# EAGLE board electric_fence (EAGLE 8.2.0)
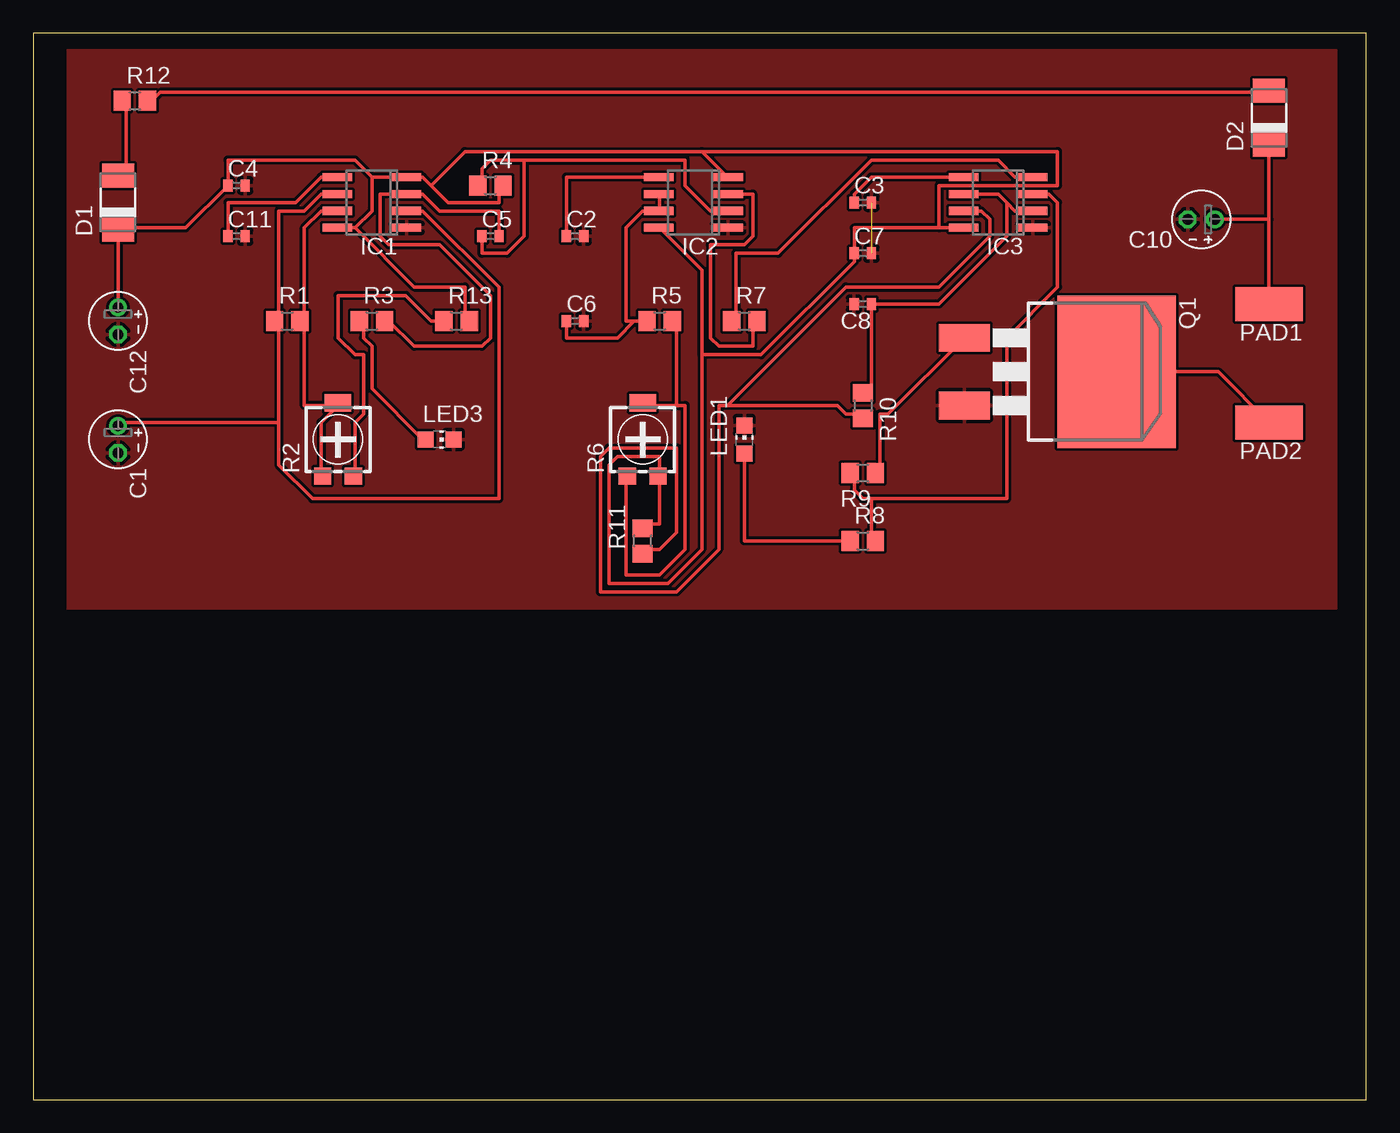
[diagram p0: board, top side]

Size 100 x 80 mm. Coordinates in mm from the lower left corner, seen from the top.
Outline: 0,0 100,0 100,80 0,80 0,0
Copper layers (1*16): Top 0.035mm / dielectric 1.5mm / Bottom 0.035mm
Design rules "default": minimum track width 10mil, minimum drill 24mil, track to track 8mil, track to pad 8mil, pad to pad 8mil, via to via 8mil, smd to smd 8mil, copper to edge 40mil, drill to drill 8mil, minimum pad ring 10mil, minimum via ring 8mil, stop-mask expansion 4mil, vias tented up to drill 0mil, thermal gap 10mil

## Footprints (pad centres in the part's own frame; a part is rotated, then mirrored left to right if it is on the bottom)
E2-4 = drill 0.813 pad 1.27: + -1.016,0 | drill 0.813 pad 1.27 octagon: - 1.016,0
C0402 = smd 0.7 x 0.9: 1 -0.65,0; 2 0.65,0
DO-214AC = smd 1.8 x 2.4: A 2.025,0; C -2.025,0
SO08 = smd 0.6 x 2.2: 1 -1.905,-2.6; 2 -0.635,-2.6; 3 0.635,-2.6; 4 1.905,-2.6; 5 1.905,2.6; 6 0.635,2.6; 7 -0.635,2.6; 8 -1.905,2.6
CHIP-LED0805 = smd 1.2 x 1.2: A 0,-1.05; C 0,1.05
SMD2,54-5,08 = smd 2.54 x 5.08: 1 0,0
D2PACK = smd 2.083 x 3.81: 1 -2.54,-8.89; 3 2.54,-8.89 | smd 11.43 x 8.89: 2 0,2.54
R0805 = smd 1.3 x 1.5: 1 -0.95,0; 2 0.95,0
RTRIM4G/J = smd 1.3 x 1.3: 1 -1.15,-2.75; 3 1.15,-2.75 | smd 2 x 1.3: 2 0,2.75

## Placement (x,y rotation side)
C1  10u  [E2-4]  6.35,49.53 270 top
C2  0.01  [C0402]  40.64,64.77 0 top
C3  0.01  [C0402]  62.23,67.31 0 top
C4  0.1  [C0402]  15.24,68.58 0 top
C5  0.01  [C0402]  34.29,64.77 0 top
C6  0.47  [C0402]  40.64,58.42 0 top
C7  0.1  [C0402]  62.23,63.5 0 top
C8  0.1  [C0402]  62.23,59.69 180 top
C10  1000u  [E2-4]  87.63,66.04 180 top
C11  0.01  [C0402]  15.24,64.77 0 top
C12  220u  [E2-4]  6.35,58.42 270 top
D1  [DO-214AC]  6.35,67.31 90 top
D2  [DO-214AC]  92.71,73.66 90 top
IC1  LM555D  [SO08]  25.4,67.31 90 top
IC2  LM555D  [SO08]  49.53,67.31 90 top
IC3  LM555D  [SO08]  72.39,67.31 90 top
LED1  [CHIP-LED0805]  53.34,49.53 0 top
LED3  [CHIP-LED0805]  30.48,49.53 270 top
PAD1  [SMD2,54-5,08]  92.71,59.69 90 top
PAD2  [SMD2,54-5,08]  92.71,50.8 90 top
Q1  IRF3704S  [D2PACK]  78.74,54.61 270 top
R1  470  [R0805]  19.05,58.42 0 top
R2  470k  [RTRIM4G/J]  22.86,49.53 0 top
R3  620  [R0805]  25.4,58.42 0 top
R4  33k  [R0805]  34.29,68.58 0 top
R5  2k4  [R0805]  46.99,58.42 0 top
R6  100k  [RTRIM4G/J]  45.72,49.53 0 top
R7  100  [R0805]  53.34,58.42 0 top
R8  620  [R0805]  62.23,41.91 0 top
R9  100  [R0805]  62.23,46.99 180 top
R10  68k  [R0805]  62.23,52.07 270 top
R11  3k3  [R0805]  45.72,41.91 90 top
R12  51  [R0805]  7.62,74.93 0 top
R13  47k  [R0805]  31.75,58.42 0 top

## Library data of the parts
C1 C10 C12 R2 R6 = resistor
C2-C8 C11 = rcl
D1 D2 = diode
IC1-IC3 = linear
LED1 LED3 = led
PAD1 PAD2 = wirepad
Q1 = transistor-power
R1 R3-R5 R7-R13 = eagle-ltspice; SPICEMODEL: NONE; SPICEPREFIX: R

## Nets
+12V: D2.A R12.2
GND: C1.- C2.2 C3.2 C4.2 C6.2 C7.2 C8.2 C10.- C11.2 C12.- IC1.1 IC2.1 IC3.1 LED1.C LED3.C Q1.3
N$2: C2.1 IC2.5
N$3: C3.1 IC3.5
N$4: R5.2 R6.1 R6.2
N$5: C1.+ IC1.2 IC1.6 R1.1
N$6: IC1.7 R1.2 R2.1 R2.2
N$7: C5.2 IC1.3 R3.2
N$8: LED3.A R3.1
N$9: C5.1 IC2.2 R4.1
N$10: C6.1 IC2.6 IC2.7 R5.1
N$11: IC2.3 R7.2
N$12: IC3.4 R7.1
N$13: C8.1 IC3.2 IC3.6 R10.1
N$14: C11.1 IC1.5
N$15: C4.1 C7.1 C12.+ D1.C IC1.4 IC1.8 IC2.4 IC2.8 IC3.8 R4.2 R6.3 R11.2 R13.2
N$16: IC3.3 R8.2 R9.2
N$17: LED1.A R8.1
N$18: C10.+ D2.C PAD1.1
N$19: Q1.1 R9.1
N$20: D1.A R12.1
N$21: PAD2.1 Q1.2
N$22: IC3.7 R10.2 R11.1
N$23: R2.3 R13.1

## Tracks (layer width: path | path; a pad name or v marks a point on that pad's centre or on a via)
+12V
  Top 0.254: R12.2 8.89,74.93 9.53,75.56 92.71,75.56 D2.A
GND  (1 unrouted)
  pour Top: 2.54,78.74 2.54,36.83 97.79,36.83 97.79,78.74
N$2
  Top 0.254: IC2.5 40.01,69.22 40.01,64.77 C2.1
N$3
  Top 0.254: IC3.5 62.87,69.22 61.59,67.94 61.59,67.31 C3.1
N$4
  Top 0.254: 48.26,52.07 45.72,52.07 R6.2 | 48.26,52.07 48.9,52.07 48.9,41.27 46.99,39.37 44.45,39.37 44.45,46.35 R6.1 | 48.26,52.07 48.26,58.42 R5.2
N$5
  Top 0.254: 18.41,58.42 18.41,66.67 20.32,66.67 21.59,67.94 IC1.6 | IC1.2 29.21,66.67 34.92,60.96 34.92,45.09 20.95,45.09 18.41,47.62 18.41,50.8 | 18.41,58.42 18.41,50.8 | 18.41,58.42 R1.1 | 18.41,50.8 6.35,50.8 C1.+
N$6
  Top 0.254: 22.86,52.07 21.59,50.8 21.59,46.99 R2.1 | 20.32,58.42 20.32,52.07 22.86,52.07 | 22.86,52.07 R2.2 | IC1.7 21.59,66.67 20.32,65.41 20.32,58.42 | 20.32,58.42 R1.2
N$7
  Top 0.254: C5.2 34.92,64.77 34.92,66.67 30.48,66.67 29.21,67.94 IC1.3 26.04,67.94 26.04,64.77 26.67,64.14 30.48,64.14 34.29,60.33 34.29,57.15 33.66,56.52 28.57,56.52 26.67,58.42 R3.2
N$8
  Top 0.254: LED3.A 29.21,49.53 25.4,53.34 25.4,56.52 24.77,57.15 24.77,58.42 R3.1
N$9
  Top 0.254: 36.83,70.48 36.83,64.77 35.56,63.5 33.66,63.5 33.66,64.77 C5.1 | 36.83,70.48 34.29,70.48 33.66,69.85 33.66,68.58 R4.1 | IC2.2 50.8,66.67 48.9,68.58 48.9,70.48 36.83,70.48
N$10
  Top 0.254: IC2.6 46.99,67.94 46.99,66.67 IC2.7 45.72,66.67 44.45,65.41 44.45,58.42 45.09,58.42 | 45.09,58.42 43.81,57.15 40.01,57.15 40.01,58.42 C6.1 | R5.1 45.09,58.42
N$11
  Top 0.254: IC2.3 53.98,67.94 53.98,64.77 53.34,64.14 50.8,64.14 50.8,57.15 51.44,56.52 53.98,56.52 53.98,58.42 R7.2
N$12
  Top 0.254: IC3.4 73.66,69.22 72.39,70.48 62.87,70.48 55.88,63.5 52.7,63.5 52.7,58.42 R7.1
N$13
  Top 0.254: R10.1 62.23,53.34 62.87,53.34 62.87,59.69 C8.1 67.94,59.69 73.03,64.77 73.03,67.31 | IC3.6 72.39,67.94 73.03,67.31 | 73.03,67.31 73.66,66.67 IC3.2
N$14
  Top 0.254: IC1.5 21.59,69.22 19.68,67.31 14.61,67.31 14.61,64.77 C11.1
N$15
  Top 0.254: R11.2 45.72,43.18 46.99,43.18 46.99,46.35 R6.3 46.99,46.99 46.99,48.26 43.81,48.26 43.18,47.62 43.18,38.73 47.62,38.73 50.16,41.27 50.16,55.88 | 61.59,63.5 61.59,65.41 67.94,65.41 | IC3.8 67.94,65.41 | 50.16,55.88 50.16,62.23 46.99,65.41 IC2.8 | 50.16,55.88 54.61,55.88 61.59,62.87 61.59,63.5 | 61.59,63.5 C7.1 | 14.61,68.58 11.43,65.41 6.35,65.41 D1.C C12.+ | 24.13,65.41 28.57,60.96 32.38,60.96 32.38,58.42 R13.2 | IC1.8 24.13,65.41 | 29.84,68.58 29.21,69.22 IC1.4 25.4,69.22 | 29.84,68.58 31.11,67.31 34.92,67.31 34.92,68.58 R4.2 | 50.16,71.12 52.07,69.22 IC2.4 | 50.16,71.12 32.38,71.12 29.84,68.58 | 24.13,65.41 25.4,66.67 25.4,69.22 | 14.61,68.58 14.61,70.48 24.13,70.48 25.4,69.22 | 14.61,68.58 C4.1 | 67.94,65.41 67.94,68.58 76.83,68.58 76.83,71.12 50.16,71.12
N$16
  Top 0.254: 62.87,45.09 62.87,41.91 R8.2 | 62.87,45.09 62.23,45.09 61.59,45.72 61.59,46.99 R9.2 | IC3.3 76.2,67.94 76.83,67.31 76.83,60.96 73.03,57.15 73.03,45.09 62.87,45.09
N$17
  Top 0.254: LED1.A 53.34,41.91 R8.1
N$18
  Top 0.254: PAD1.1 92.71,66.04 | 92.71,66.04 D2.C | 92.71,66.04 C10.+
N$19
  Top 0.254: Q1.1 64.14,51.44 63.5,51.44 63.5,46.99 R9.1
N$20
  Top 0.254: R12.1 6.99,74.93 6.99,69.85 6.35,69.85 D1.A
N$21
  Top 0.254: PAD2.1 88.9,54.61 Q1.2
N$22
  Top 0.254: 52.07,52.07 60.33,52.07 60.96,51.44 62.23,51.44 R10.2 | 52.07,52.07 51.44,52.07 51.44,41.27 48.26,38.1 42.55,38.1 42.55,48.26 43.18,48.9 48.26,48.9 48.26,42.55 46.99,41.27 45.72,41.27 R11.1 | IC3.7 71.12,66.67 71.75,66.04 71.75,64.77 67.94,60.96 60.96,60.96 52.07,52.07
N$23
  Top 0.254: R13.1 29.84,58.42 27.94,60.33 22.86,60.33 22.86,57.15 24.13,55.88 24.77,55.88 24.77,51.44 24.13,50.8 24.13,46.99 R2.3